# Altium PCB roneCPUBoard-v8.PcbDoc (part 3 of 3)
Units mil, origin at the board's own origin, x right, y up, seen from the top; angles counter-clockwise.
Board outline 3919.58 x 3919.51 mil, 2 copper layers (Top Layer, Bottom Layer); 146 components, 122 nets, 569 pads, 329 vias.
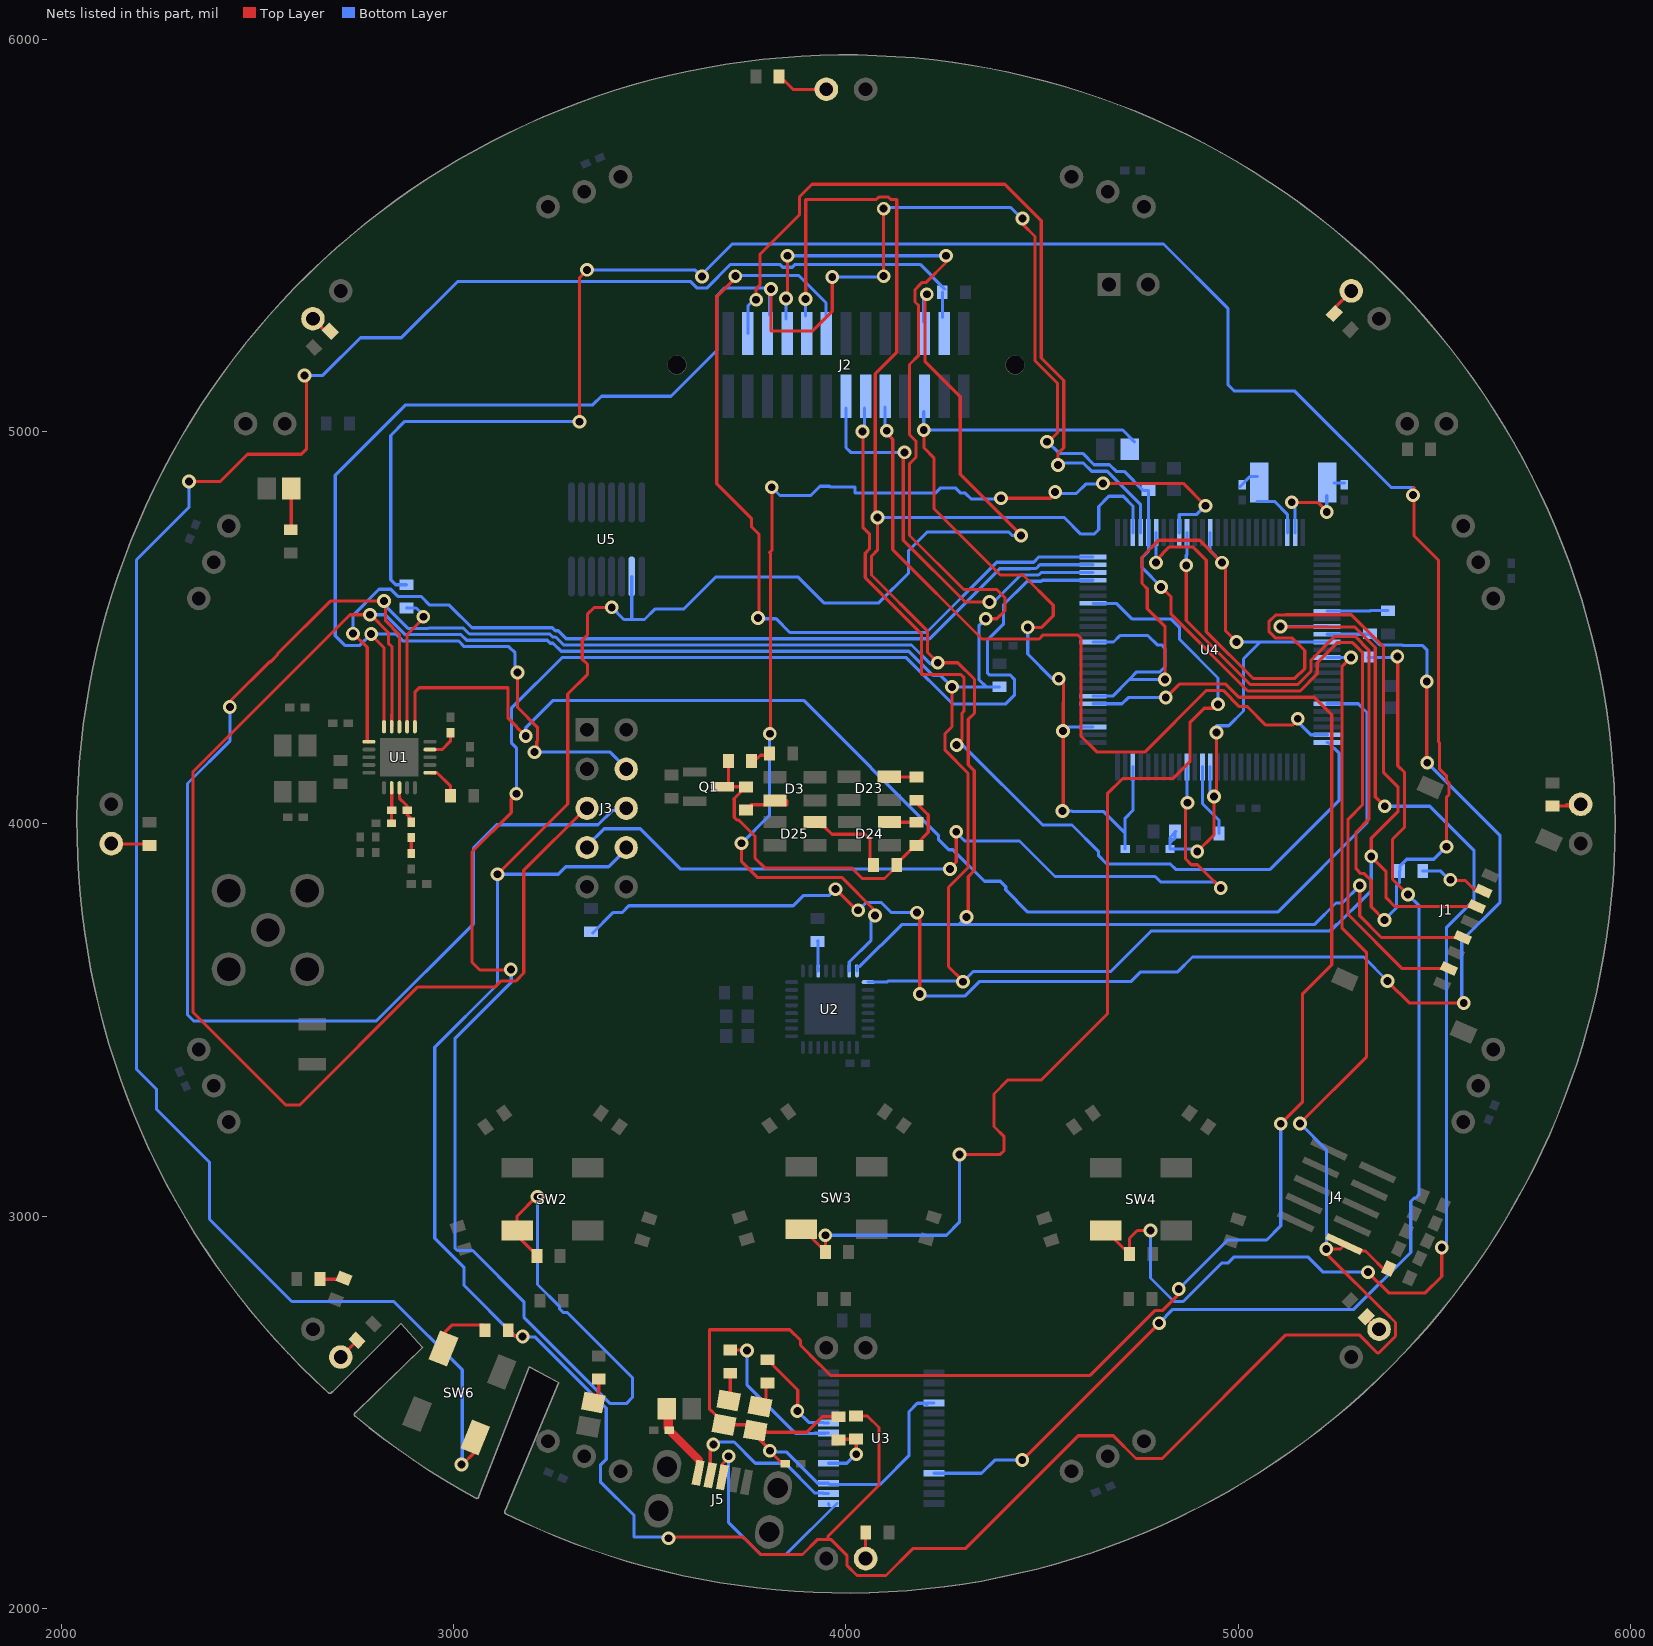
[diagram p3: the nets of this part, all layers, seen from the top]

## Via types
v1: diameter 35, hole 20, Top Layer to Bottom Layer, 321 vias
v2: diameter 25.98, hole 12.99, Top Layer to Bottom Layer, tented top, 4 vias
v3: diameter 110, hole 89, Top Layer to Bottom Layer, 4 vias

## Nets (pads, with @x,y where several pads share a name; then routed paths per layer and width w, separated by ;. In a path a pad name is that pad's centre, name@x,y a point inside that pad or via, vN(x,y) a via of type N, cw(c..) or ccw(c..) an arc to the next point about the centre after c; other vN are vias at no path point) (continued)
NetC5_2: C5.2 L3.2 | length 42
  Top Layer w8: C5.2@2891,3924 C5.2@2891.84,3924.84 ; L3.2@2892,3965.31 2892,3960.31 C5.2@2892,3925 ; C5.2@2891.84,3924.84 C5.2@2892,3925 ; C5.2@2891.84,3924.84 C5.2@2892,3925
NetC7_2: C7.2 U1.19 | length 111.9
  Top Layer w8: C7.2@2992,4232.31 C7.2@2992,4230.31 ; 2966.69,4189.69 U1.19@2939.76,4189.69 2966.69,4189.69 ; 2966.69,4189.69 2971,4189.69 2992,4210.69 C7.2@2992,4230.31 ; C7.2@2991.07,4230.95 2991,4231 C7.2@2991.07,4230.95 ; C7.2@2991.07,4230.95 C7.2@2992,4230.31 ; C7.2@2991.07,4230.95 C7.2@2992,4230.31
NetC15_2: C15.2 J5.1 L5.1 | length 461.5
  Top Layer w10: L5.1@3535,2490 3540,2490 L5.1@3543.5,2486.5 ; L5.1@3543.5,2510 L5.1@3543.5,2486.5 ; L5.1@3545,2513.5 3546,2512.5 3553.84,2504.66 3553.84,2455 3553.84,2451.16 C15.2@3553.84,2450.84 ; C15.2@3549.69,2455 3550,2455 3550,2480 3545,2485 L5.1@3543.5,2486.5 ; J5.1@3625.61,2376.39 3548.34,2453.66 3543.5,2458.5 L5.1@3543.5,2486.5
  Top Layer w20: L5.1@3545,2513.5 3545,2510 C15.2@3545,2460 ; C15.2@3553.84,2450.84 3625.61,2379.07 J5.1@3625.61,2376.39 ; C15.2@3545,2460 C15.2@3549.84,2455.16 ; C15.2@3545,2460 C15.2@3549.84,2455.16 ; C15.2@3549.84,2455.16 3554,2451 C15.2@3549.84,2455.16
NetC29_2: C29.2 U4.48 XTAL2.1 | length 192.2
  Bottom Layer w8: C29.2@5004,4859.69 5029.31,4885 XTAL2.1@5048.39,4885 ; XTAL2.1@5048,4822 5091.85,4822 5124.85,4789 U4.48@5124.85,4742.23
NetC30_2: C30.2 U4.49 XTAL2.2 | length 254.4
  Top Layer w8: v1@5135,4819 5194,4819 ; 5193,4819 5203,4819 v1@5226,4796
  Bottom Layer w8: v1@5129,4820 5144.54,4804.46 U4.49@5144.54,4742.23 ; v1(5225,4795) XTAL2.2@5225,4837 ; XTAL2.2@5244,4869 C30.2@5270.69,4869
  other v1: 5136,4820
NetD1_2: D1.2 R10.2 | length 105.7
  Top Layer w8: R10.2@2585,4749.53 2586.5,4753.5 D1.2@2586.5,4855
NetD2_2: D2.2 R37.2 | length 73.6
  Top Layer w8: D2.2@3700.96,2530.93 3705,2530.93 3705,2535 3705,2595.47 R37.2@3705,2600.47
NetD3_2: D3.2 R36.2 | length 150.8
  Top Layer w8: R36.2@3745,4035.47 3758.53,4049 3818.82,4049 3837,4049 3849,4049 3849,4060 D3.2@3818.82,4060
NetD4_2: D4.2 R44.2 | length 57.2
  Top Layer w8: R44.2@3759.53,4160 3767,4160 3782,4175 3801,4175 3805.47,4175 D4.2@3805.47,4180
NetD6_2: D6.2 R31.2 | length 87.4
  Top Layer w8: D6.2@3780.96,2536 D6.2@3780.96,2515.93 3796,2530.97 3796,2575.47 R31.2@3796,2577
NetD22_2: D22.2 R45.2 | length 73.4
  Top Layer w8: D22.2@3355.96,2525.93 3360,2525.93 3360,2537 3356,2537 3370,2551 R45.2@3370,2585.47
NetD23_2: D23.2 R38.2 | length 69.8
  Top Layer w8: D23.2@4110.18,4120 R38.2@4180,4120
NetD24_2: D24.2 R39.2 | length 69.3
  Top Layer w8: D24.2@4111.18,4005 4117.53,4005 4117.53,4004.53 R39.2@4180,4004.53
NetD25_2: D25.2 R43.2 | length 235
  Top Layer w8: D25.2@3921.18,4005 3937,4005 3937,3993 3945,3993 3964.31,3973.69 4048.31,3973.69 4061,3961 4061,3904.47 R43.2@4070.47,3895
NetD26_1: D26.1 R20.2 U3.19 | length 167
  Top Layer w8: R20.2@3984,2432 D26.1@4027,2432 ; v1(4026,2394) D26.1@4026,2431
  Bottom Layer w8: U3.19@3955.55,2371.02 4002.02,2371.02 4028,2397 4028,2396 v1(4026,2394)
NetD28_2: D28.2 R68.2 | length 64.1
  Top Layer w8: R68.2@2659.53,2840 D28.2@2721,2840 ; D28.2@2717,2837.38 D28.2@2717,2840
NetL1_1: L1.1 L2.1 U1.12 | length 92.4
  Top Layer w8: L2.1@2841.69,4000 2842,4001 2842,4002 2842,4035 2842,4037 2842.32,4037.32 U1.12@2842.32,4092.24
NetL1_2: L1.2 L3.1 U1.13 | length 100.1
  Top Layer w8: U1.13@2862,4092.24 2862,4066 2881,4047 L1.2@2881,4035 ; L1.2@2881.69,4035 2881.69,4033 2881.69,4023.31 L3.1@2892,4013 ; L3.1@2892,4004.69 L3.1@2892,4013 ; L3.1@2892,4013.45 L3.1@2892,4013
NetQ1_3: Q1.3 R36.1 R38.1 R39.1 R43.1 R44.1 | length 969.5
  Top Layer w8: Q1.3@3685.43,4095 Q1.3@3700.94,4095 ; R44.1@3700.47,4160 3700.47,4095.47 Q1.3@3700.94,4095 ; R36.1@3745,4094.53 3714,4063.53 3715.28,4062.24 3715.28,4016.72 3722.31,4009.69 3727.31,4009.69 3768,3969 3768,3913 3793,3888 4014,3888 4041,3861 4098,3861 4130,3893 R43.1@4129.53,3895 4129.53,3898.53 4179,3948 R39.1@4180,3945.47 4182,3945 4180,3947 4180,3949.03 4209.72,3978.75 4209.72,4023.28 4202.69,4030.31 4180,4052.99 R38.1@4180,4060.47 ; R36.1@3746,4095 R36.1@3745,4095 ; R36.1@3751,4095 R36.1@3745,4095 ; Q1.3@3700.94,4095 R36.1@3745,4095
NetR2_2: R2.2 U1.16 | length 105.9
  Top Layer w8: U1.16@2939.76,4130.63 2957.84,4130.63 2992.47,4096 R2.2@2992.47,4079 ; R2.2@2991.39,4079 R2.2@2992.47,4079 ; R2.2@2992.47,4070 2993.47,4071 2995.85,4073.38 2995.85,4077 2993,4077 2993,4079 R2.2@2992.47,4079 ; R2.2@2992.47,4072 R2.2@2992.47,4079
NetR3_1: R3.1 SW6.2 | length 169.9
  Top Layer w8: SW6.2@2974.54,2663.42 2974.54,2702.54 2995,2723 3078,2723 3080,2721 3080,2710 R3.1@3080,2705
NetR4_1: R4.1 T1.1 | length 133.9
  Top Layer w8: R4.1@3829.53,5905 3833,5904 3865,5872 T1.1@3950,5872
NetR7_1: R7.1 T8.1 | length 76.7
  Top Layer w8: R7.1@5244.12,5300.88 5244.12,5314.12 5288,5358 T8.1@5289,5359
NetR13_1: R13.1 T7.1 | length 148.3
  Top Layer w8: T7.1@5872,4050 5837.53,4050 5833,4045.47 R13.1@5800,4045.47 5872,4045.47 T7.1@5874.47,4045.47
NetR14_1: R14.1 T3.1 | length 99.5
  Top Layer w8: T3.1@2128,3950 2129,3949 2223,3949 R14.1@2225,3945.47
NetR15_1: R15.1 R16.1 U4.35 | length 6685
  Top Layer w8: v1(3321,5025) 3321,5392 3335,5406 v1@3338,5406 ; v1@4867,4668 v1(4867,4659) 4867,4518.63 5030.63,4355 5150.63,4355 5185,4389.37 5185,4417.63 5245.37,4478 5297.66,4478 5332.5,4443.16 5332.5,4012.18 5300,3979.68 5300,3885.5 5312,3873.5 5321,3873.5 5338.5,3856 5338.5,3788.83 v1(5372.05,3755.28) ; v1(5445,4838) 5445,4855 5447,4857 5447,4735 5510,4672 5510,4209 5512.14,4206.86 5512.14,4140.82 5530,4122.96 5530,4111.83 5536.57,4105.26 5536.57,4074.36 5530,4067.79 v1(5530,3942)
  Bottom Layer w8: R16.1@2880,4609.53 2852.47,4609.53 2840,4622 2840,4990 2876,5026 v1@3318,5026 ; v1(3340,5412) 3615,5412 v1@3631,5396 ; v1@3631,5399 3710,5478 4809,5478 4973,5314 4973,5120 4990,5103 5144,5103 5390,4857 5447,4857 5445,4855 v1(5445,4838) ; v1(4867,4659) 4867,4685 4868.94,4686.94 ; 4868.94,4685.94 4868.94,4686.94 ; U4.35@4868.94,4742.23 4868.94,4686.94 ; 4869,4687 4868.94,4686.94 ; v1(5372.05,3755.28) 5402.5,3785.73 5402.5,3841.53 5410.47,3849.5 R15.1@5410.47,3880 ; R15.1@5412,3881 5412,3893.5 5428.5,3910 5498,3910 v1(5530,3942)
  other v1: 3633,5395
NetR19_1: R19.1 T2.1 | length 87.2
  Top Layer w8: T2.1@2664.36,5287.64 T2.1@2641.64,5287.64 2673.41,5255.88 R19.1@2685.88,5255.88 ; R19.1@2691,5261 2693.5,5258.5 R19.1@2691,5261
NetR24_1: R24.1 R30.1 U4.61 | length 3883.8
  Top Layer w8: v1@3975,3832 4027,3780 v1(4031,3780) ; v1@4182,3773 4188,3767 v1(4188,3567) ; v1@5382,3597 5435,3544 v1(5574,3544) ; v1(5480,4363) 5480,4161 v1@5484,4157
  Bottom Layer w8: R24.1@3354,3722 3406,3774 3429.37,3774 3446.87,3791.5 3865.25,3791.5 3891.06,3817.31 3956.31,3817.31 v1(3973,3834) ; v1@4033,3783 4035,3783 4052,3800 4090,3800 4116,3774 v1(4181,3774) ; v1@4189,3567 4194,3562 4303.72,3562 4340.72,3599 4727,3599 4751,3623 4845,3623 4883,3661 5319,3661 v1(5380,3600) ; U4.61@5226.23,4483.37 5278,4483.37 5278.16,4483.53 R30.1@5335,4483.53 ; R30.1@5335,4484.53 R30.1@5335,4483.53 ; R30.1@5337,4483.53 R30.1@5335,4483.53 ; v1(5481,4156) 5667,3970 5667,3801 5569,3703 5569,3549 v1(5574,3544) v1@5575,3543 ; v1@5481,4366 5481,4443 5469.5,4454.5 5419.22,4454.5 5417.22,4456.5 5360.51,4456.5 5335,4482.01 R30.1@5335,4483.53
NetR25_2: R25.2 U2.27 | length 81.3
  Bottom Layer w8: R25.2@3927,3700.47 3929,3703 3929,3700.47 3929,3633 3929.47,3633 U2.27@3929.47,3625.44
NetR26_1: R26.1 T6.1 | length 54.6
  Top Layer w8: R26.1@5325.88,2744.12 5329,2744.12 5329,2739 5326,2739 5352,2713 5357.71,2713 T6.1@5358.36,2712.36
NetR27_1: R27.1 T4.1 | length 82.1
  Top Layer w8: T4.1@2712,2641 2712.5,2641.5 T4.1@2712.64,2641.64 ; T4.1@2712.36,2641.64 T4.1@2712.64,2641.64 ; T4.1@2733.64,2641.64 T4.1@2712.64,2641.64 ; R27.1@2755,2684 2754.62,2683.62 T4.1@2712.64,2641.64
NetR31_1: R31.1 U3.23 | length 257.6
  Top Layer w8: R31.1@3800,2634.53 3877,2557.53 3877,2504 v1@3877,2502
  Bottom Layer w8: v1(3876,2504) 3905,2475 3943,2475 3943,2473.39 U3.23@3955.55,2473.39
NetR32_1: R32.1 T5.1 | length 69.5
  Top Layer w8: T5.1@4050,2126 T5.1@4050,2128 4050,2195 R32.1@4050,2195.47
NetR33_1: R33.1 U4.58 | length 155.2
  Bottom Layer w8: U4.58@5226.23,4542.43 5335,4542.43 5336.1,4543.53 R33.1@5381,4543.53
NetR34_2: R34.2 U4.89 | length 187.3
  Bottom Layer w8: U4.89@4908.32,4145.77 4908.32,4051.77 4950.53,4009.56 R34.2@4950.53,3976
NetR37_1: R37.1 U3.22 | length 414
  Top Layer w8: R37.1@3705,2659.53 v1@3744.47,2659.53
  Bottom Layer w8: v1(3748,2658) 3748,2570 3871,2447 U3.22@3947,2447 ; 3919.35,2447 3920.14,2447.8 U3.22@3955.55,2447.8
POWER_BUTTON: J2.23 R56.1 SW6.3 | length 5520.4
  Top Layer w8: v1(2326,4873) 2406,4873 2475,4942 2612,4942 2625,4955 v1@2625,5142 ; v1@3021.5,2366.5 3055.46,2400.46 SW6.3@3055.46,2436.59
  Bottom Layer w8: v1(2326,4873) 2326,4807.02 2192,4673.02 2192,3375 2243,3324 2243,3273 2378,3138 2378,2993 2588,2783 2848,2783 3022,2609 v1@3022,2368 ; v1(2620,5143) 2667,5143 2763,5239 2867,5239 3010,5382 3604.28,5382 3620.78,5365.5 3645.22,5365.5 3705.72,5426 3831.28,5426 3838.78,5418.5 3863.22,5418.5 3870.72,5426 4189,5426 R56.1@4252,5363 ; J2.23@4245.47,5290.53 R56.1@4245.47,5355
  other v1: 3020,2368
QEI_0A: J2.11 U4.25 | length 2182.6
  Top Layer w8: v1@3720,5392.75 3670.5,5343.25 3670.5,4867.13 3759,4778.63 3759,4758 3778,4739 3778,4527 v1@3771,4520
  Bottom Layer w8: v1@3720,5398 3879,5398 3949,5328 J2.11@3949,5291 ; v1@3776,4523 3822,4523 3857,4488 4205,4488 4384,4667 4424,4667 ; 4425,4667 4478,4667 4491.22,4680.22 U4.25@4629.77,4680.22
  other v1: 3776,4525 3718,5396
QEI_0B: J2.14 U4.23 | length 1058
  Top Layer w8: v1@4146,4946 4146,4723.37 4303.87,4565.5 v1(4365.5,4565.5)
  Bottom Layer w8: J2.14@4000,5060 4000,4959 4012,4947 v1(4149,4947) ; v1(4365.5,4565.5) 4376.5,4565.5 4445.5,4634.5 4490.75,4634.5 4497.1,4640.85 U4.23@4629.77,4640.85
QEI_1A: J2.16 U4.75 | length 2395.4
  Top Layer w8: v1@4048,5000 4043,4995 4043,4756 4059.5,4739.5 4059.5,4700.78 4049,4690.28 4049,4627.88 4192,4484.88 4192,4381 4292.37,4381 4301.11,4372.26 4301.11,4288.11 4295.5,4282.5 4295.5,4214.5 v1(4282,4201)
  Bottom Layer w8: v1(4042,5000) 4047,5000 J2.16@4047,5060 ; v1(4282,4201) 4297.5,4201 4501,3997.5 4576,3997.5 4643,3930.5 4643,3920 4664.84,3898.16 4826.23,3898.16 4840,3884.39 5080.88,3884.39 5257,4060.5 5257,4180 5229.22,4207.78 U4.75@5226.23,4207.78
QEI_1B: J2.18 U4.74 | length 1983.2
  Top Layer w8: v1(4104,5002) 4101,5002 4099,5000 4119,4980 4119,4699 4346.5,4471.5 4492.08,4471.5 4502.58,4482 4590,4482 4599,4473 4599,4224 4640,4183 4761,4183 4918.5,4340.5 4960.99,4340.5 5002.49,4299 5023,4299 5070,4252 5137,4252 v1@5153,4268 ; v1@5151,4267 v1(5151,4268)
  Bottom Layer w8: J2.18@4099,5062 4099,5000 4101,5002 v1(4104,5002) ; v1@5151,4267 v1(5151,4268) ; v1@5152,4259.46 5184,4227.46 U4.74@5226.23,4227.46
RADIO_CE: U1.1 U4.70 | length 3386.9
  Top Layer w8: U1.1@2901.37,4247.76 2901.37,4335.74 2912.63,4347 3139,4347 3139,4269 v1(3184,4224)
  Bottom Layer w8: v1@3185,4223 v1(3184,4224) 3184,4245 3254,4315 3892,4315 4235.5,3971.5 4235.5,3961.15 4262.15,3934.5 4272.5,3934.5 4353,3854 4393,3854 4407,3840 4407,3831.95 4463.45,3775.5 5100,3775.5 5327.5,4003 5327.5,4284.18 5305.48,4306.2 U4.70@5226.23,4306.2
RADIO_IRQ: U1.6 U4.24 | length 2384.8
  Top Layer w8: v1@2745,4485 2780,4450 2780,4209.37 U1.6@2784.24,4209.37
  Bottom Layer w8: v1(2744,4485) 2744,4532 2810,4598 2840,4598 2858,4580 2916.95,4580 2939.15,4557.8 2989.2,4557.8 3047,4500 3251.88,4500 3259.38,4492.5 3266.75,4492.5 3287.25,4472 4213,4472 4391.5,4650.5 4468.5,4650.5 4469,4651 4484.63,4651 4494.16,4660.54 U4.24@4629.77,4660.54
RESET: D26.2 J2.21 J3.8 J4.10 R3.2 R57.1 U4.64 U5.10 | length 10350.5
  Top Layer w8: v1(3112,3872) 3291,4051 3291,4331.28 3341.5,4381.78 3341.5,4406.22 3328,4419.72 3328,4468.28 3341,4481.28 3341,4534 3359,4552 v1(3403,4552) ; R3.2@3139.53,2710 3143,2710 3158,2695 v1@3182,2695 ; v1(3548,2180) 3548,2182 3552,2186 3555,2183 3737.78,2183 3782.46,2138.32 3889.32,2138.32 3928,2177 3961,2177 4003,2135 4003,2110 4028,2085 4102,2085 4171,2154 4305,2154 4592,2441 4681,2441 4739,2383 4806,2383 5121,2698 5308,2698 5354,2652 5357.4,2652 5400.36,2694.96 5400.36,2729.75 5375.75,2754.36 5374.64,2754.36 5225,2904 v1@5225,2917 ; 3954,2181 3954,2185 4084,2315 4084,2368 ; D26.2@4026,2491.53 4054.47,2491.53 4084,2462 4084,2368 ; 4084,2370 4084,2368 ; v1@4201,5344 4201,5179 4291,5089 4291,4891 v1@4445,4737 ; v1@4445,4735 v1@4445,4737 ; v1@4445,4745 v1@4445,4737 ; v1(5157,3237) 5326,3406 5326,3673 5263.5,3735.5 5263.5,4400.81 v1(5287,4424.31) ; v1(5224,2917) v1@5225,2917 ; v1@5225,2920 v1@5225,2917 ; J4.10@5269.13,2929.87 5273,2926 5273,2930 5260,2917 v1@5225,2917 ; J4.10@5302,2912 5324,2912 5382,2854 5382,2867.48 R57.1@5383.24,2867.48
  Bottom Layer w8: v1@3176,2693 3207,2693 3389,2511 3389,2381 3374,2366 3374,2324 3460,2238 3460,2183 v1@3548,2183 ; v1@3178,2696 3155,2696 3027,2824 3027,2869 2952,2944 2952,3431 3112,3591 v1(3112,3872) 3267,3872 3286,3891 3395,3891 J3.8@3440,3936 ; v1(3403,4552) 3434,4521 3453.98,4521 ; U5.10@3453.98,4630.51 3453.98,4521 ; J2.21@4198,5279 4198,5350 v1(4206,5350) ; v1@4441,4735 4423.63,4735 4414.63,4744 4207,4744 4159.24,4696.24 4159.24,4638.87 4083.87,4563.5 3943.78,4563.5 3878.28,4629 3667.46,4629 3585.96,4547.5 3512.98,4547.5 3486.48,4521 3453.98,4521 ; v1(5157,3237) 5224,3170 v1(5224,2917) ; U4.64@5226.23,4424.31 v1(5287,4424.31)
  other v1: 3176,2694 4446,4735
SPI_CLK: J1.5 J2.9 J3.6 U1.3 U2.32 U4.28 | length 9755.8
  Top Layer w8: v1@2433,4298.63 2433,4315 2531.5,4413.5 2534.22,4413.5 2551.5,4430.78 2551.5,4433.5 2686,4568 v1(2823,4568) ; v1@2827,4566 2827,4517.63 2862,4482.63 U1.3@2862,4247.76 ; v1@3901,5339 3897.5,5342.5 3897.5,5591.5 4077.78,5591.5 4083.78,5597.5 4108.22,5597.5 4114.22,5591.5 4129.5,5591.5 4129.5,5201.87 4074.5,5146.87 4074.5,4786.5 v1(4080,4781) 4080,4697.5 4065,4682.5 4065,4634.51 4208,4491.51 4208,4437 v1(4234,4411) 4285,4411 4327.5,4368.5 4327.5,4282.5 4311.5,4266.5 4311.5,4151.13 4327,4135.63 4327,3881.37 4311.5,3865.87 4311.5,3780 4307,3775.5 v1(4307,3763) ; v1(5309,3843) 5309,3765.75 5364.15,3710.6 J1.5@5571.73,3710.6
  Bottom Layer w8: v1(2430,4298) 2430,4211 2322,4103 2322,3514 2338,3498 2803,3498 3051,3746 3051,3939 3110,3998 3368,3998 3404,4034 J3.6@3434,4034 ; v1(2823,4568) 2823,4559.01 2883.51,4498.5 2935.22,4498.5 2935.72,4499 3025.37,4499 3040.37,4484 3245.25,4484 3252.75,4476.5 3260.13,4476.5 3280.63,4456 4167.01,4456 4215.01,4408 4231,4408 v1(4234,4411) ; J2.9@3897,5294 v1(3897,5338) ; U2.32@4027.9,3625.44 4027.9,3637 4035.5,3637 4142,3743.5 4287.5,3743.5 ; v1(4080,4781) 4442.37,4781 ; v1(4307,3763) 4287.5,3743.5 ; 4443,4781 4556,4781 4598.5,4738.5 4632,4738.5 4644,4750.5 4644,4809 4670,4835 4706.37,4835 4731.15,4810.22 U4.28@4731.15,4742.23 ; v1(5309,3843) 5264.49,3798.49 5248.49,3798.49 5193.5,3743.5 4287.5,3743.5
SPI_MISO: J1.7 J2.5 J3.4 R40.2 U1.5 U4.30 | length 7100.5
  Top Layer w8: v1@2793,4479 2822.63,4449.37 U1.5@2822.63,4247.76 ; v1(3163,4386) 3163,4297 3213.5,4246.5 3213.5,4211.78 3212,4210.28 3212,4188 3215,4185 v1@3203,4185 ; v1(3809,5363) 3809,5256 3914,5256 3965,5307 v1(3965,5394) ; v1(4096,5396) v1@4096,5564 ; v1(4450,5543) 4450,5528.5 4481.5,5497 4481.5,5180.87 4539,5123.37 4539,4997 v1@4516,4974 ; v1(4803,4604) 4828.5,4578.5 4828.5,4534.5 5024,4339 5157.25,4339 5201,4382.75 5201,4411 5252,4462 5291.03,4462 5316.5,4436.53 5316.5,4049.5 5279.5,4012.5 5279.5,3769.48 5417.5,3631.48 J1.7@5536.5,3631.48
  Bottom Layer w8: v1@3161,4384 3157,4388 3157,4436 3141,4452 3027.12,4452 3012.62,4466.5 2870.25,4466.5 2852.75,4484 v1(2790,4484) 2761,4455 2723,4455 2698.5,4479.5 2698.5,4888.5 2878,5068 3355,5068 3377,5090 3554,5090 3670.5,5206.5 3670.5,5345.22 3691.28,5366 v1@3805,5366 ; v1(3206,4183) 3399,4183 J3.4@3441,4141 ; J2.5@3805,5297 v1@3805,5363 ; v1(3965,5394) v1@4095,5394 ; v1@4098.5,5570.5 4420.5,5570.5 v1@4449,5542 ; v1@4512,4976 4543.5,4944.5 4602.85,4944.5 4631.91,4915.44 4671.19,4915.44 4673.13,4913.5 4673.85,4913.5 4688.85,4898.5 4708.76,4898.5 4757.79,4849.47 R40.2@4770.52,4849.47 ; R40.2@4771,4849.47 R40.2@4770.52,4849.47 ; v1(4803,4604) 4754.5,4652.5 4754.5,4679.16 4770.52,4695.18 U4.30@4770.52,4742.23 R40.2@4770.52,4849.47
  other v1: 4512,4974 4096,5568
SPI_MOSI: J1.3 J2.7 J3.5 R41.2 U1.4 U2.1 U4.31 | length 11245.5
  Top Layer w8: v1(2787,4533) 2736,4533 2336,4133 2336,3520 2572,3284 2608,3284 2909,3585 3106,3585 3120.5,3599.5 3158.22,3599.5 3179,3620.28 3179,3882 J3.5@3340,4043 ; v1@2788,4534 2834,4488 2834,4460.63 2843,4451.63 2843,4280 ; U1.4@2842.32,4247.76 2842.32,4279.32 2843,4280 ; 2843,4267.5 2843,4280 ; v1@3851,5339 v1(3851,5448) ; 4184,5370 4193.5,5379.5 4203.5,5379.5 v1@4256,5432 ; 4188.14,5373.86 4176,5361.72 4176,5330.28 4185,5321.28 4185,5194 4162,5171 4162,4992.22 4178.5,4975.72 4178.5,4934.78 4162,4918.28 4162,4735.2 4299.7,4597.5 4384,4597.5 4405.5,4576 4405.5,4544 4384.5,4523 v1(4356,4523) ; v1(4270,4349.47) 4270,4248 4252.5,4230.5 4252.5,4187.5 4311,4129 4311,3888 4261.36,3838.36 4261.36,3636.64 v1@4299,3599 ; v1(4790.2,4666) 4790.2,4672.2 4824,4706 4884,4706 4918,4672 4918,4490.25 5037.25,4371 5144,4371 5169,4396 5169,4442 5137.44,4473.56 5119.28,4473.56 5119.22,4473.5 5094.78,4473.5 5077.5,4490.78 5077.5,4515.22 5094.78,4532.5 5119.22,4532.5 5119.72,4533 5287.92,4533 5370,4450.92 5370,4131 5407,4094 5407,4032 5338.5,3963.5 v1(5338.5,3917.5) ; v1@5330,3925 5376.5,3878.5 5376.5,3811.99 5398.76,3789.73 J1.3@5606.96,3789.73
  Bottom Layer w8: v1(2787,4533) 2826.38,4533 2876.88,4482.5 2941.85,4482.5 2942.35,4483 3018.75,4483 3033.75,4468 3238.63,4468 3246.13,4460.5 3253.5,4460.5 3274,4440 4160.38,4440 4221.38,4379 4240.47,4379 v1(4270,4349.47) 4357.06,4349.47 ; J2.7@3847,5287 v1(3847,5339) ; v1(3851,5448) v1(4255,5448) ; U2.1@4056.44,3596.9 4104.18,3596.9 4106.78,3599.5 4296.5,3599.5 v1(4298,3598) 4324,3624 4675,3624 4778.5,3727.5 5232.94,3727.5 ; v1(4356,4523) 4338.53,4505.53 4338.53,4368 4357.06,4349.47 ; R41.2@4391,4349.47 4357.06,4349.47 ; v1(4790.2,4666) U4.31@4790.2,4742.23 ; 5249.44,3744 5232.94,3727.5 ; v1@5330,3925 v1@5338.5,3916.5 ; 5338.5,3824 5338.5,3830.07 ; v1(5338.5,3917.5) v1@5338.5,3916.5 ; 5232.94,3727.5 5235.93,3727.5 5338.5,3830.07 ; 5338.5,3830.07 v1@5338.5,3916.5
SPI_SEL_AUDIO: J3.7 U4.91 | length 2183.1
  Top Layer w8: v1@4267,3889 4281,3903 v1(4281,3980) ; v1@4272.5,3981.5 v1@4281,3990 ; v1(4870,4054) 4865.5,4049.5 4865.5,3910.69 4880,3896.19 4895.81,3896.19 v1(4955,3837)
  Bottom Layer w8: J3.7@3341,3945 3384,3988 3476,3988 3579,3885 v1(4265,3885) ; v1@4281,3978 4302.5,3956.5 4442.27,3956.5 4532.62,3866.16 4787.63,3866.16 4801.4,3852.39 4939.61,3852.39 v1(4955,3837) ; U4.91@4868.94,4145.77 4868.94,4055.06 v1(4870,4054)
SPI_SEL_CPU: J2.3 U4.29 | length 2059.6
  Top Layer w8: v1(3771,5336) 3771,5363.89 3781,5373.89 3781,5452 3881.5,5552.5 3881.5,5598.13 3913.37,5630 4405,5630 4497.5,5537.5 4497.5,5187.5 4555,5130 4555,4959 4540,4944 v1@4540,4909
  Bottom Layer w8: J2.3@3750,5250.02 3750,5320 v1@3768,5338 ; v1@4540,4912 4548,4920 4604.72,4920 4626.22,4898.5 4626.5,4898.5 4627,4899 4665,4899 4666.5,4897.5 4667.22,4897.5 4750.83,4813.89 U4.29@4750.83,4742.23
  other v1: 4540,4915
SPI_SEL_LED: U2.31 U4.34 | length 2891.8
  Top Layer w8: v1(3734,3951) 3734,3904 3774,3864 3989,3864 4074,3779 v1(4074,3767) ; v1@3805,4224 3807.5,4226.5 3807.5,4689 3805,4691.5 ; 3806,4692 3811,4697 v1(3811,4858) ; v1@4396,4830 4522,4830 v1@4535,4843 ; v1(4655,4868) 4859,4868 v1(4916,4811)
  Bottom Layer w8: v1(3734,3951) 3805,4022 v1@3805,4224 ; v1@3806.96,4858.96 3808.5,4860.5 3832,4837 3910.28,4837 3933.78,4860.5 3958.22,4860.5 3959.75,4858.96 4023,4858.96 ; U2.31@4008.21,3625.44 4008.21,3648.21 4064,3704 4064,3756 v1@4075,3767 ; 4023,4859 4023,4843 4227.65,4843 4241.15,4856.5 4278.85,4856.5 4292.35,4843 4304,4843 4319,4828 v1@4395,4828 ; v1@4530,4842 4587,4842 4611,4866 v1@4658,4866 ; U4.34@4849.26,4742.23 4849.26,4789 4894,4789 v1(4916,4811)
  other v1: 3806,4230 4395,4830 4533,4846
SPI_SEL_RADIO: R16.2 U1.2 | length 351.6
  Top Layer w8: U1.2@2881.69,4247.76 2881.69,4482.69 v1@2926,4527
  Bottom Layer w8: R16.2@2880,4550.47 R16.2@2881,4550.47 ; R16.2@2881,4551 R16.2@2881,4550.47 ; v1@2925,4530 2904.53,4550.47 R16.2@2881,4550.47
  other v1: 2923,4528
SPI_SEL_SD: J1.2 R15.2 | length 170.4
  Top Layer w8: v1@5544,3856 5578,3856 5604,3830 5621,3830 J1.2@5624.57,3829.29
  Bottom Layer w8: R15.2@5469.53,3880 5516,3880 v1@5539,3857
  other v1: 5540,3858
SW_BLUE: R23.1 SW4.3 U4.60 | length 3373.3
  Top Layer w8: SW4.3@4662,2964 R23.1@4723,2903 ; R23.1@4722.47,2904 4722.47,2944 4742.47,2964 v1(4776,2964) ; v1@5103,4502 5296.29,4502 5348.5,4449.79 5348.5,4069.5 v1(5373,4045) ; v1(5330,2858) 5383,2805 5476,2805 5518,2847 v1(5518,2921)
  Bottom Layer w8: v1(4776,2964) 4776,2843 4836,2783 4859,2783 4957,2881 4973,2881 4989,2897 5177,2897 5216,2858 v1(5330,2858) ; v1(5107,4503) 5131.94,4503 5132,4503.06 U4.60@5226.23,4503.06 ; v1(5373,4045) 5488,4045 5600,3933 5600,3806 5530,3736 5530,2933 v1(5518,2921)
SW_GREEN: R21.1 SW3.3 U4.19 | length 2781.1
  Top Layer w8: SW3.3@3886,2967 3891,2967 3945,2913 R21.1@3947.47,2909 v1(3947.47,2952) ; v1(4289,3158) 4393,3158 4403,3168 4403,3203 4377,3229 4377,3312 4413,3348 4498.37,3348 4666,3515.63 4666,4077 4704.5,4115.5 4832.5,4115.5 4877,4160 4877,4259.37 4912.63,4295 4938.12,4295 v1(4948,4304.88)
  Bottom Layer w8: v1(3947.47,2952) 4256,2952 4289,2985 v1(4289,3158) ; U4.19@4629.77,4562.11 4688.89,4562.11 4728.5,4522.5 4827.41,4522.5 4850.05,4499.86 4850.05,4469.95 4948,4372 v1(4948,4304.88)
SW_RED: R22.1 SW2.3 U4.22 | length 4984.3
  Top Layer w8: v1@3148,3628 3067,3628 3047,3648 3047,3929 3147,4029 3147,4063 v1@3158,4074 ; v1@3212,3051 3162,3001 SW2.3@3162,2964 3162,2951 3213,2900 R22.1@3212.47,2899
  Bottom Layer w8: v1@3147,3630 3147,3597 3004,3454 3004,2918.63 3009.63,2913 3048.62,2913 3179.2,2782.42 3179.2,2743.43 3399.63,2523 3440,2523 3456,2539 3456,2589 3290.25,2754.75 3280,2754.75 3269.5,2765.25 3269.5,2770.91 3214,2826.41 v1(3214,3050) ; 3148,4295 3148,4206 3160,4194 v1(3160,4077) ; 3148,4295.72 3276.28,4424 4153.75,4424 4270,4307.75 ; 4270,4308 4272,4306 4407,4306 4429,4328 4429,4369 4418,4380 4365,4380 4361,4384 4361,4469 4401.08,4509.08 4401.08,4558.08 4461.5,4618.5 4497.83,4618.5 4500.5,4621.17 U4.22@4629.77,4621.17
  other v1: 3146,3629
USB_CTS: R30.2 U3.11 | length 3116.7
  Top Layer w8: v1(4449,2379) v1(4798,2728) ; v1@5406,4440 5406,4148.79 5423.35,4131.44 5423.35,3991.74 5392.5,3960.89 5392.5,3859.5 v1(5432,3820)
  Bottom Layer w8: U3.11@4224.45,2345.43 4345.3,2345.43 4378.87,2379 v1(4449,2379) ; v1(4798,2728) 4833,2763 5294,2763 5439,2908 5439,3038 5448,3047 5451.5,3047 5460.5,3056 5460.5,3791.5 v1(5432,3820) ; R30.2@5331,4424.47 5390.47,4424.47 5393,4427 v1@5408,4427
  other v1: 5405,4427
USBDM: J5.2 U3.16 | length 432.1
  Top Layer w8: J5.2@3654.04,2338.04 3654.04,2340.96 3654.07,2419 v1@3654.07,2422
  Bottom Layer w8: v1@3662,2425 3715,2425 3769,2371 3845,2371 3921,2295 3942,2295 3942,2294.25 U3.16@3955.55,2294.25
  other v1: 3662,2419
USBDP: J5.3 U3.15 | length 602.8
  Top Layer w8: J5.3@3685,2335 3685,2369 v1@3707,2391
  Bottom Layer w8: v1(3701,2389) 3701,2219.78 3782.46,2138.32 3846.96,2138.32 U3.15@3977,2268.37 ; U3.15@3955.55,2268.66 U3.15@3957,2264
V_USB: C16.2 D2.1 D6.1 R20.1 U3.4 U3.17 U4.6 | length 5019.7
  Top Layer w8: D2.1@3668,2494 3652,2510 3652,2711 3857,2711 3884,2684 3884,2672 3908,2648 3908,2647.6 3960.6,2595 4622,2595 4787,2760 4806,2760 4848,2802 v1(4848,2815) ; D2.1@3689.04,2469.07 3757.93,2469.07 3763.57,2452.24 3764.89,2448.29 3765.99,2445.01 v1@3807,2404 ; D6.1@3761.99,2447.01 3769.04,2439.96 D6.1@3769.04,2454.07 ; D6.1@3770,2450 3900,2450 3939.53,2489.53 R20.1@3981,2489.53 ; v1(3806,2403) 3805,2403 3839,2369 3839,2370 C16.2@3845.31,2370 ; v1@3806,2415 v1@3807,2404 ; v1@3812,2396 3812,2403 v1@3807,2404 ; v1(4815,4322) 4849.5,4356.5 4967.62,4356.5 5001.12,4323 5193.63,4323 5238,4278.63 5238,3641 5163,3566 5163,3291 v1(5108,3236)
  Bottom Layer w8: v1@3803,2400 3848,2400 3928.16,2319.84 U3.17@3955.55,2319.84 3958.89,2316.5 4086.5,2316.5 4093,2323 ; 4089.84,2319.84 4093,2323 ; U3.4@4224.45,2524.57 4206,2524.57 4206,2520 4205,2520 4201,2524 4182,2524 4161,2503 4161,2391 4093,2323 ; U4.6@4629.77,4306.2 4703.5,4306.2 4719.3,4322 v1(4815,4322) ; v1(4848,2815) 4973,2940 5072,2940 5108,2976 v1(5108,3236)
VDD25: C31.2 C32.2 U4.7 U4.14 U4.38 U4.62 U4.88 | length 2546.8
  Top Layer w8: v1(4812.5,4368) 4812.5,4504 4767.76,4548.74 4767.76,4599.33 4754.26,4612.83 4754.26,4680.26 4797,4723 4901,4723 v1(4958,4666) 4967,4657 4967,4492 v1(4995,4464) ; v1(4895,3930) 4938,3973 v1(4938,4070) 4944,4076 v1(4944,4233)
  Bottom Layer w8: U4.7@4629.77,4325.89 4679,4325.89 4679.19,4326.09 4679.39,4325.89 4721.31,4367.81 ; U4.14@4629.77,4463.69 4681.69,4463.69 4698,4480 4769.5,4480 4793.19,4456.31 4804.19,4456.31 4812.5,4448 4812.5,4399.99 4800,4387.49 4740.99,4387.49 4721.5,4368 ; v1(4812.5,4368) 4721.5,4368 ; C31.2@4838.56,3981 4838.56,3964.87 4825.69,3952 C32.2@4825.69,3936 ; C31.2@4841,3981 4825.69,3965.69 C32.2@4825.69,3936 ; v1(4895,3930) 4889,3936 C32.2@4825.69,3936 ; U4.88@4928,4145.77 4928,4080 v1(4938,4070) ; U4.38@4928,4742.23 4928,4696 v1(4958,4666) ; v1(4944,4233) 4944,4250.14 4975.14,4250.14 5013,4288 5013,4420.69 5056,4463.69 ; v1(4995,4464) 4995.31,4463.69 5056,4463.69 ; U4.62@5226.23,4463.69 5056,4463.69 ; 4721.31,4367.81 4721.5,4368 ; 4721.31,4367.81 4721.11,4368 4721.5,4368
VDDA: C28.2 J2.22 L4.1 U4.3 U4.98 | length 2310.7
  Top Layer w8: v1@4199,5005 4199,4958 4224,4933 4224,4804 4393.5,4634.5 4451,4634.5 4528,4557.5 4528,4530.5 4498.5,4501 v1(4463,4501) ; v1(4542,4370) 4554,4358 4554,4309.72 4553.5,4309.22 v1@4553.5,4033
  Bottom Layer w8: J2.22@4198,5051 v1(4198,5004) 4705,5004 L4.1@4735,4974 ; v1(4463,4501) 4463,4433 4526,4370 v1(4542,4370) ; v1(4552,4033) 4576,4033 4577,4032 4656,4032 4711.31,3976.69 ; v1@4556,4240 4560,4240 4567.15,4247.15 U4.3@4629.77,4247.15 ; C28.2@4711.31,3936 4711.31,3976.69 ; U4.98@4731.15,4145.77 4731.15,4034.5 4711.31,4014.66 4711.31,3976.69
  other v1: 4553,4237
pads on no net: ANT2.2 D3.1 D3.3 D23.1 D23.3 D24.1 D24.3 D25.1 D25.3 J1. J1.1 J1.8 J2.17 J2.20 J2.24 J2.c1 J2.c2 J4.7 SW2.1 SW2.4 SW3.1 SW3.4 SW4.1 SW4.4 SW6.1 SW6.4 U1.21 U2.2 U2.24 U2.25 U3.2 U3.3 U3.6 U3.8 U3.9 U3.10 U3.12 U3.13 U3.14 U3.24 U3.27 U3.28 U4.16 U4.17 U4.37 U4.40 U4.43 U4.46 U4.51 U4.52 U4.53 U4.55 U5.9
copper on no net:
  other v1: 3911.76,3480.76 3959,3480.76 4006.24,3480.76 3911.76,3528 3959,3528 4006.24,3528 3911.76,3575.24 3959,3575.24 4006.24,3575.24
  other v2: 2838.38,4146.38 2885.62,4146.38 2838.38,4193.62 2885.62,4193.62
  other v3: 2960,2830 5040,2830 2960,5170 5040,5170

## Polygon pours and split planes (outlines as drawn)
GND on Bottom Layer "GND" (solid, pour order 1003): 2352,3558 2815.66,3558 3020,3821 3017,3943 3129,4066 3136,4436 2655.48,4436 2352,4050.54
GND on Top Layer "LED Gnd" (solid, pour order 1000): 3745.35,3730.65 4152.35,3730.65 4152.35,3340.65 3751.35,3340.65 3745.35,3346.65

## Other copper
Top Layer:
  region net 3.3V: 4200.46,2937.04 4203.55,2946.55 4156,2962 4152.91,2952.49
  region net 3.3V: 4151,3227 4142.91,3232.88 4113.52,3192.43 4121.61,3186.55
  region net 3.3V: 3859.09,3262.88 3851,3257 3880.39,3216.55 3888.48,3222.43
  region net 3.3V: 3728.45,3006.55 3731.54,2997.04 3779.09,3012.49 3776,3022
  rectangle net 3.3V: 3941,2797 3951,2847
  rectangle net 3.3V: 3217,2794 3227,2844
  region net 3.3V: 3007.45,2976.55 3010.54,2967.04 3058.09,2982.49 3055,2992
  region net 3.3V: 3476.46,2934.04 3479.55,2943.55 3432,2959 3428.91,2949.49
  region net 3.3V: 3427,3224 3418.91,3229.88 3389.52,3189.43 3397.61,3183.55
  region net 3.3V: 3135.09,3259.88 3127,3254 3156.39,3213.55 3164.48,3219.43
  rectangle net 3.3V: 4717,2794 4727,2844
  region net 3.3V: 4976.46,2934.04 4979.55,2943.55 4932,2959 4928.91,2949.49
  region net 3.3V: 4504.45,3003.55 4507.54,2994.04 4555.09,3009.49 4552,3019
  region net 3.3V: 4927,3224 4918.91,3229.88 4889.52,3189.43 4897.61,3183.55
  region net 3.3V: 4635.09,3259.88 4627,3254 4656.39,3213.55 4664.48,3219.43
Multi-Layer:
  lines w8: 2746,2496 2920,2670 2863,2727
  lines w10: 2685,2549 2863,2727 ; 2685.41,2549.65 cw(c4000,4000) 3130.99,2246.01 3267,2577 3193,2616 3063,2281 ; 2749.01,2494.99 ccw(c4000,4000) 3060.96,2282.96

## Silkscreen, mask and mechanical layers (free items; w line width, h text height)
Top Overlay:
  drawing of 2375 lines, arcs and shapes, not listed
  text "sck" at 4583,5241 h45 r90
  text "miso" at 4770,5238 h45 r90
  text "mosi" at 4685,5236 h45 r90
  text "cs" at 4465,5034 h45 r90
  text "gnd" at 4171,4986 h45 r90
  text "gyro" at 3867,4948 h45 r90
  text "FR" at 5401,4810 h90
  text "FL" at 2450,4805 h90
  text "GND" at 2592,4702 h45
  text "Heart" at 5046,4596 h90
  text "Beat" at 5090,4482 h90
  text "RADIO" at 2371,4422 h90
  text "JTAG" at 5213,4238 h90
  text "IRbeacon" at 3828,4140 h90
  text "G" at 3967,3776 h90
  text "RED" at 3132,3520 h90
  text "BLUE" at 4598,3514 h90
  text "RST" at 5497,3510 h90
  text "rone-v1.6" at 5800,3477 h45 r81.85
  text "chg" at 4362,2926 h45 r90
  text "gnd" at 3388,2908 h45
  text "P0A" at 3578,2901 h45 r90
  text "P0B" at 3656,2901 h45 r90
  text "VBAT" at 4563,2900 h45 r90
  text "VBATS" at 4470,2898 h45 r90
  text "usb" at 4631,2897 h45 r90
  text "1" at 3276,2730 h60 r90
  text "1A" at 4172,2697 h45 r90
  text "1B" at 3877,2694 h45 r90
  text "1A" at 3789,2693 h45 r90
  text "Q1B" at 4250,2652 h45 r90
  text "33V" at 4775,2648 h45 r90
  text "ON" at 4652,2510 h90
Bottom Overlay:
  text "8962-CPU" at 5377,4206 h90
  text "FTDI" at 4039,2520 h90
Mechanical 1:
  lines w5: 2000,4000 6000,4000 ; 4000,2000 4000,6000

## Text inside footprints (layer, text, board x,y; h text height)
J3: Top Overlay "2" at 3420,4340 h50 r270; Top Overlay "1" at 3320,4320 h50 r270; Top Overlay "9" at 3320,3780 h50 r270; Top Overlay "10" at 3420,3780 h50 r270